# Altium PCB AD7175.PcbDoc
Units mil, origin at the board's own origin, x right, y up, seen from the top; angles counter-clockwise.
Board outline 2780 x 1750 mil, 2 copper layers (Top Layer, Bottom Layer); 97 components, 55 nets, 296 pads, 449 vias.
Unrouted connection lines stored in the file: 60.
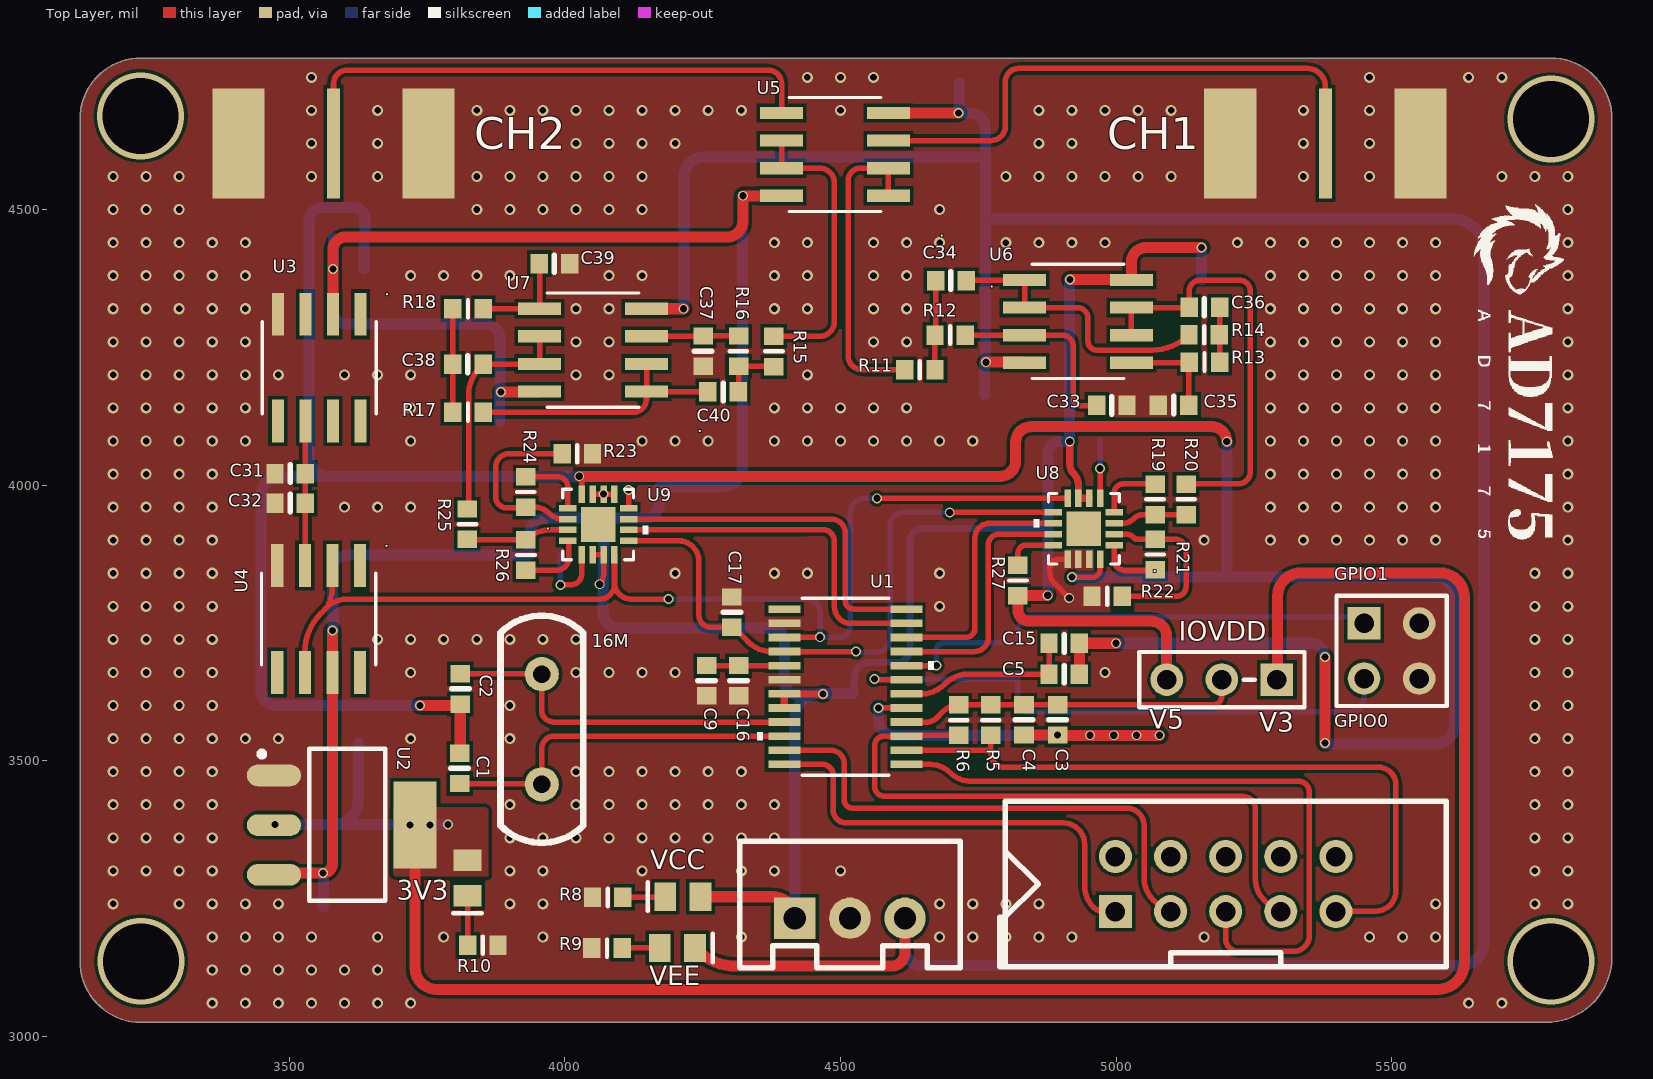
[diagram p0: Top Layer view]
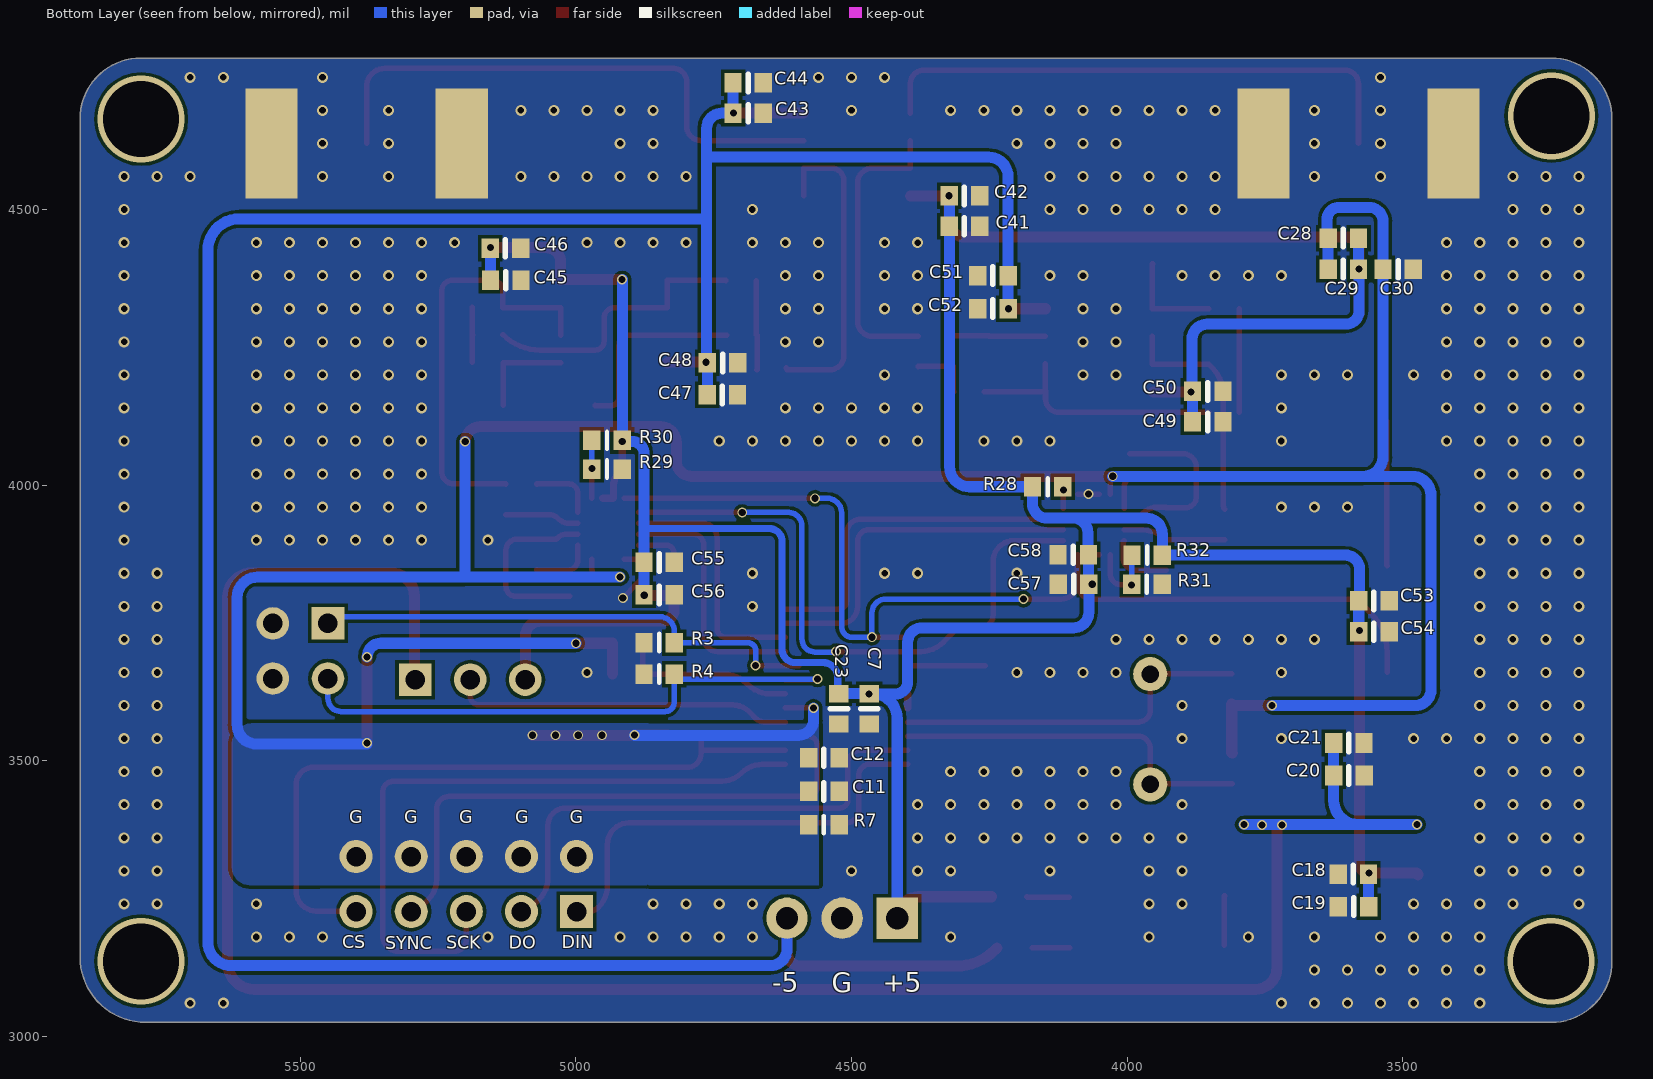
[diagram p1: Bottom Layer view, seen from below]

## Layer stack, top to bottom
Top Solder: solder mask 0.4, Solder Resist, Dk 3.5
Top Layer: signal copper 1.4
Dielectric 1: dielectric 12.6, FR-4, Dk 4.8
Bottom Layer: signal copper 1.4
Bottom Solder: solder mask 0.4, Solder Resist, Dk 3.5

## Board outline
3120,3135.83 ccw(c3230.83,3135.83) 3230.83,3025 4085,3025 5781.01,3025 ccw(c5781.01,3143.99) 5900,3143.99 5900,4664.17 ccw(c5789.17,4664.17) 5789.17,4775 3230.83,4775 ccw(c3230.83,4664.17) 3120,4664.17

## Design rules (kind name [scope] priority, off if disabled: settings)
Clearance [All] p1: gap=6 ignorepadtopadclearanceinfootprint=FALSE except(0: Arc-Hole Track-Hole SMDPad-Hole THPad-Hole Via-Hole Fill-Hole Poly-Hole Region-Hole Text-Hole; 5: Arc-SMDPad Arc-THPad Track-SMDPad Track-THPad SMDPad-SMDPad SMDPad-THPad THPad-THPad)
PolygonConnect [All] p1: connectstyle=Direct reliefconductorwidth=10 reliefentries=4 polygonreliefangle="90 Angle" airgapwidth=10
RoutingVias [All] p1: holewidth=28 width=50 viastyle="Through Hole" minholewidth=28 minwidth=50 maxholewidth=28 maxwidth=50
SolderMaskExpansion [All] p1: expansion=4 istentingtop=FALSE
Width [All] p1: maxlimit=100 minlimit=10 preferedwidth=10
30 further rules are at their usual default settings.

## Classes and differential pairs
component class reference: C28 C29 C30 C31 C32 C53 C54 U3 U4
component class power: C7 C18 C19 C20 C21 C23 R8 R9 R10 U2
component class filter: C33 C34 C35 C36 C37 C38 C39 C40 C45 C46 C47 C48 C49 C50 C51 C52 R11 R12 R13 R14 R15 R16 R17 R18 U6 U7
component class fda: C55 C56 C57 C58 R19 R20 R21 R22 R23 R24 R25 R26 R27 R28 R29 R30 R31 R32 U8 U9
component class core: C1 C2 C3 C4 C5 C9 C11 C12 C15 C16 C17 C41 C42 C43 C44 CH1 CH2 IOVDD R3 R4 R5 R6 R7 U1 U5

## Components (designator, comment, footprint, x,y, rotation, side; value= is the part's Value field where it differs from the comment)
3V3 "LED" Led-0805_L 3823,3287 r270 top (schematic designator LED3)
16M "XTAL" XTAL-PB2-DIP 3966,3547 r270 top value=16M (schematic designator Y1)
C1 "Cap-S" C0603-L 3809,3486 r90 top value=20pF
C2 "Cap-S" C0603-L 3810,3630 r270 top value=20pF
C3 "Cap-S" C0603-L 4894,3574 r90 top value=1uF
C4 "Cap-S" C0603-L 4833,3574 r90 top value=100nF
C5 "Cap-S" C0603-L 4906,3657 r180 top value=1uF
C7 "Cap-S" C0603-L 4468,3594 r270 bottom value=1uF
C9 "Cap-S" C0603-L 4257,3645 r90 top value=1uF
C11 "Cap-S" C0603-L 4550,3444 r180 bottom value=1uF
C12 "Cap-S" C0603-L 4550,3505 r180 bottom value=100nF
C15 "Cap-S" C0603-L 4906,3713 r180 top value=100nF
C16 "Cap-S" C0603-L 4315,3645 r90 top value=100nF
C17 "Cap-S" C0603-L 4303,3769.44 r270 top value=100nF
C18 "Cap-S" C0603-L 3589.44,3294 r180 bottom value=1uF
C19 "Cap-S" C0603-L 3588.88,3235 r180 bottom value=100nF
C20 "Cap-S" C0603-L 3597.44,3473 r0 bottom value=100nF
C21 "Cap-S" C0603-L 3597.56,3532 r0 bottom value=1uF
C23 "Cap-S" C0603-L 4523,3594 r270 bottom value=100nF
C28 "Cap-S" C0603-L 3607.44,4448 r180 bottom value=4.7uF
C29 "Cap-S" C0603-L 3607.44,4392 r180 bottom value=100nF
C30 "Cap-S" C0603-L 3508,4392 r0 bottom value=100nF
C31 "Cap-S" C0603-L 3501.44,4021 r0 top value=4.7uF
C32 "Cap-S" C0603-L 3501.44,3967 r0 top value=100nF
C33 "Cap-S" C0603-L 4992.44,4145 r180 top value=13pF
C34 "Cap-S" C0603-L 4700.44,4371 r0 top value=130pF
C35 "Cap-S" C0603-L 5104.44,4145 r0 top value=10pF
C36 "Cap-S" C0603-L 5160.44,4323 r180 top value=119pF
C37 "Cap-S" C0603-L 4251,4243 r90 top value=13pF
C38 "Cap-S" C0603-L 3824,4219 r0 top value=119pF
C39 "Cap-S" C0603-L 3981,4402 r180 top value=10pF
C40 "Cap-S" C0603-L 4287,4169 r180 top value=130pF
C41 "Cap-S" C0603-L 4295,4470 r0 bottom value=100nF
C42 "Cap-S" C0603-L 4295,4525 r0 bottom value=1uF
C43 "Cap-S" C0603-L 4687.44,4675 r0 bottom value=100nF
C44 "Cap-S" C0603-L 4687.44,4730 r0 bottom value=1uF
C45 "Cap-S" C0603-L 5127.44,4372 r0 bottom value=100nF
C46 "Cap-S" C0603-L 5128,4430 r0 bottom value=1uF
C47 "Cap-S" C0603-L 4734.44,4164 r0 bottom value=100nF
C48 "Cap-S" C0603-L 4734,4222 r0 bottom value=1uF
C49 "Cap-S" C0603-L 3853.56,4115 r0 bottom value=100nF
C50 "Cap-S" C0603-L 3853.56,4170 r0 bottom value=1uF
C51 "Cap-S" C0603-L 4243.44,4380 r180 bottom value=100nF
C52 "Cap-S" C0603-L 4243.44,4320 r180 bottom value=1uF
C53 "Cap-S" C0603-L 3552,3790 r0 bottom value=100nF
C54 "Cap-S" C0603-L 3552,3734 r0 bottom value=1uF
C55 "Cap-S" C0603-L 4849,3860 r0 bottom value=100nF
C56 "Cap-S" C0603-L 4849,3801 r0 bottom value=1uF
C57 "Cap-S" C0603-L 4097,3820 r180 bottom value=100nF
C58 "Cap-S" C0603-L 4097.61,3873.31 r180 bottom value=1uF
CH1 "SMA" SMA1 5380,4620 r270 top
CH2 "SMA" SMA1 3580,4620 r270 top
GPIO1 "Header 2X2" HDR2X2 5450,3749 r270 top (schematic designator GPIO)
IOVDD "Jumper" JUMPER1x3 5192,3647 r180 top
POWER "Power-3P" SIPA03 4417,3214 r0 top
R3 "R" R0603-L 4849,3714 r180 bottom value=10K
R4 "R" R0603-L 4849,3657 r180 bottom value=10K
R5 "R" R0603-L 4773,3573.56 r90 top value=10K
R6 "R" R0603-L 4715,3573.56 r90 top value=10K
R7 "R" R0603-L 4550.12,3384 r0 bottom value=0R
R8 "R" R0603-L 4077.44,3252 r180 top value=1K
R9 "R" R0603-L 4076.44,3160 r180 top value=1K
R10 "R" R0603-L 3851,3165 r0 top value=600R
R11 "R" R0603-L 4644,4209 r0 top value=6.25K
R12 "R" R0603-L 4699,4272 r0 top value=177K
R13 "R" R0603-L 5160.44,4223 r0 top value=31.9K
R14 "R" R0603-L 5160,4273 r180 top value=31.9K
R15 "R" R0603-L 4379,4242.56 r270 top value=6.25K
R16 "R" R0603-L 4315,4243 r90 top value=177K
R17 "R" R0603-L 3824,4132 r0 top value=31.9K
R18 "R" R0603-L 3824,4320 r180 top value=31.9K
R19 "R" R0603-L 5071,3974 r90 top value=1K
R20 "R" R0603-L 5127,3974 r270 top value=1K
R21 "R" R0603-L 5071,3874 r270 top value=1K
R22 "R" R0603-L 4984,3798 r0 top value=1K
R23 "R" R0603-L 4022.44,4057 r180 top value=1K
R24 "R" R0603-L 3929,3987.56 r90 top value=1K
R25 "R" R0603-L 3823,3929 r270 top value=1K
R26 "R" R0603-L 3929,3873 r270 top value=1K
R27 "R" R0603-L 4822,3827 r270 top value=0R
R28 "R" R0603-L 4144,3997 r0 bottom value=0R
R29 "R" R0603-L 4943.56,4029 r180 bottom value=0R
R30 "R" R0603-L 4943.56,4081 r180 bottom value=0R
R31 "R" R0603-L 3964,3820 r180 bottom value=0R
R32 "R" R0603-L 3963.56,3873 r180 bottom value=0R
SPI "DC-10P" DC-10P 5198.94,3226 r180 top
U1 "AD7175-2BRUZ" RU_24_ADI 4509,3634 r0 top
U2 "AMS1117" SOT-223 3597,3383 r270 top
U3 "ADR4540ARZ" R_8_ADI 3554,4213 r270 top
U4 "AD8628ARZ" R_8_ADI 3553,3757 r270 top
U5 "ADA4084-2ARZ" R_8_ADI 4490,4600 r180 top
U6 "ADA4084-2ARZ" R_8_ADI 4931,4297 r0 top
U7 "ADA4084-2ARZ" R_8_ADI 4051,4245 r180 top
U8 "ADA4945-1" CP_16_22 4941.53,3920.79 r180 top
U9 "ADA4945-1" CP_16_22 4060.21,3928.53 r0 top
VCC "LED" Led-0805_L 4214,3253 r180 top (schematic designator LED1)
VEE "LED" Led-0805_L 4204,3160 r0 top (schematic designator LED2)

## Footprints (in the part's own frame and the unit in brackets; to place one, negate y for a bottom-side part, rotate by r counter-clockwise, add the part's x,y. Pads: shape width x height; smd on the part's side, far side on the other; paste and mask are expansions set on the pad)
C0603-L [mm] "贴片电容0603 高密度"
  rect 0.8x0.9 smd: 1(-0.7,0) 2(0.7,0)
  silkscreen extent 0,-0.39 0,0.41, body extent -0.8,-0.4 0.8,0.41, height 0.88
CP_16_22 [mm]
  rect 0.805x0.3 smd paste+0 mask+0: 1(-1.402,0.75) 2(-1.402,0.25) 3(-1.402,-0.25) 4(-1.402,-0.75) 9(1.402,-0.75) 10(1.402,-0.25) 11(1.402,0.25) 12(1.402,0.75)
  rect 0.3x0.805 smd paste+0 mask+0: 5(-0.75,-1.402) 6(-0.25,-1.402) 7(0.25,-1.402) 8(0.75,-1.402) 13(0.75,1.402) 14(0.25,1.402) 15(-0.25,1.402) 16(-0.75,1.402)
  rect 1.6x1.6 smd paste-0.787 mask+0: 17(0,0)
  silkscreen extent -1.63,-1.63 2.31,1.63, body extent 0,0 0.25,0.25, height 0.25
DC-10P [mil]
  rect 60x60 hole 35.43: 1(200,0)
  round 60 hole 35.43: 2(100,0) 3(0,0) 4(-100,0) 5(-200,0) 6(-200,-100) 7(-100,-100) 8(0,-100) 9(100,-100) 10(200,-100)
  silkscreen extent -400,-200 410,100, body extent -401,-233 401,123, height 357
HDR2X2 [mm] "Connector; Header; 2x2 Position"
  rect 1.5x1.5 hole 0.9: 1(0,0)
  round 1.5 hole 0.9: 2(0,2.54) 3(2.54,0) 4(2.54,2.54)
  silkscreen extent -1.27,-1.27 3.81,3.81
JUMPER1x3 [mm]
  rect 1.5x1.5 hole 0.9: 1(-2.54,0)
  round 1.5 hole 0.9: 2(0,0) 3(2.54,0)
  silkscreen extent -3.81,-1.27 3.81,1.27, body extent -3.81,-1.27 3.81,1.3, height 9.26
Led-0805_L [mm] "贴片LED0805-高密度"
  rect 1x1.3 smd: 1(-0.813,0) 2(0.813,0)
  silkscreen extent 1.63,-0.66 1.63,0.66, body extent -1.03,-0.44 1.03,0.47, height 0.85
R0603-L [mm] "贴片电阻0603 高密度"
  rect 0.8x0.9 smd: 1(-0.7,0) 2(0.7,0)
  silkscreen extent 0,-0.39 0,0.41, body extent -0.81,-0.43 0.79,0.39, height 0.53
R_8_ADI [mil]
  rect 78x22 smd paste+0 mask+0: 1(-97,75) 2(-97,25) 3(-97,-25) 4(-97,-75) 5(97,-75) 6(97,-25) 7(97,25) 8(97,75)
  silkscreen extent -84,-103 84,104, body extent -122,-99 122,99, height 69
RU_24_ADI [mil]
  rect 58x14 smd paste+0 mask+0: 1(-111,140.75) 2(-111,115.16) 3(-111,89.57) 4(-111,63.98) 5(-111,38.39) 6(-111,12.8) 7(-111,-12.8) 8(-111,-38.39) 9(-111,-63.98) 10(-111,-89.57) 11(-111,-115.16) 12(-111,-140.75) 13(111,-140.75) 14(111,-115.16) 15(111,-89.57) 16(111,-63.98) 17(111,-38.39) 18(111,-12.8) 19(111,12.8) 20(111,38.39) 21(111,63.98) 22(111,89.57) 23(111,115.16) 24(111,140.75)
  silkscreen extent -160,-160 160,160, body extent -126,-156 126,156, height 47
SIPA03 [mil]
  rect 75x75 hole 40: 1(0,0)
  round 75 hole 40: 2(100,0) 3(200,0)
  silkscreen extent -100,-90 300,140, body extent -96,-99 298,137, height 276
SMA1 [mil]
  rect 200x24 smd: 1(0,0)
  rect 200x95 smd: 2(0,-172.5) 2(0,172.5)
  rect 200x95 smd far side: 2(0,-172.5)
  rect 200x95 smd far side mask+4: 2(0,172.5)
  body extent -475,-187 87,187, height 171
SOT-223 [mm]
  oval 1x2.5 smd: 1(-2.29,-3.175) 2(0,-3.175) 3(2.29,-3.175)
  rect 4x2 smd: 2(0,3.325)
  silkscreen extent -3.52,-3.86 3.48,1.96, body extent -3.25,-3.2 3.25,3.76, height 1.66
XTAL-PB2-DIP [mil]
  round 62 hole 32: 1(-110,-8) 2(90,-8)
  silkscreen extent -216,-83 196,67, body extent -234,-99 212,85, height 142

## Part data
3V3 VCC VEE: "发光二极管"
16M: "晶振"
C1 C2 C3 C4 C5 C7 C9 C11 C12 C15 C16 C17 C18 C19 C20 C21 C23 C28 C29 C30 C31 C32 C33 C34 C35 C36 C37 C38 C39 C40 C41 C42 C43 C44 C45 C46 C47 C48 C49 C50 C51 C52 C53 C54 C55 C56 C57 C58: "贴片瓷片电容"
GPIO1: "Header, 2-Pin, Dual row", LatestRevisionDate=17-Jul-2002, LatestRevisionNote="Re-released for DXP Platform.", Publisher="Altium Limited"
IOVDD: library part Jumper1*3
POWER: "供电端子"
R3 R4 R5 R6 R7 R8 R9 R10 R11 R12 R13 R14 R15 R16 R17 R18 R19 R20 R21 R22 R23 R24 R25 R26 R27 R28 R29 R30 R31 R32: library part Res, "贴片电阻"
U1 U3 U4 U5 U6 U7: "No Description Available", Mfr_Name="Analog Devices Inc", Copyright="Copyright (C) 2021 Ultra Librarian. All rights reserved.", RefDes=RefDes, Type=DEV
  U1: Manufacturer_Part_Number=AD7175-2BRUZ
  U3: Manufacturer_Part_Number=ADR4540ARZ
  U4: Manufacturer_Part_Number=AD8628ARZ
  U5 U6 U7: Manufacturer_Part_Number=ADA4084-2ARZ

## Via types
v1: diameter 20, hole 12, Top Layer to Bottom Layer, 402 vias
v2: diameter 18, hole 13, Top Layer to Bottom Layer, 43 vias
v3: diameter 157.48, hole 137.8, Top Layer to Bottom Layer, 4 vias

## Nets (pads, with @x,y where several pads share a name; then routed paths per layer and width w, separated by ;. In a path a pad name is that pad's centre, name@x,y a point inside that pad or via, vN(x,y) a via of type N, cw(c..) or ccw(c..) an arc to the next point about the centre after c; other vN are vias at no path point)
3V3: 3V3.1 C20.2 C21.2 IOVDD.1 U2.2 | length 3903.6
  Top Layer w20: U2.2@3727.91,3383 3727.91,3124.09 ccw(c3767,3124.09) 3767,3085 5584,3085 ccw(c5584,3133) 5632,3133 5632,3796.57 ccw(c5587.91,3796.57) 5587.91,3840.66 5335.66,3840.66 ccw(c5335.66,3798) 5293,3798 5293,3648 cw(c5292,3648) IOVDD.1
  Bottom Layer w20: v2(3474,3384) 3581,3384 ; C21.2 3625,3532 C20.2 3625,3428 cw(c3581,3428) 3581,3384 ; v2(3788,3384) 3581,3384
  other v2: 3719,3383 3755,3383
AIN0: U1.21 U8.11 | length 460
  Top Layer w10: U1.21 4742.98,3697.98 ccw(c4742.98,3723) 4768,3723 4768,3891 cw(c4787.94,3891) 4787.94,3910.94 U8.11
AIN1: U1.22 U8.10 | length 454.9
  Top Layer w10: U1.22 4727.57,3723.57 ccw(c4727.57,3740) 4744,3740 4744,3904 cw(c4770.63,3904) 4770.63,3930.63 U8.10
AIN2: U1.23 U9.10 | length 653.1
  Top Layer w10: U9.10 4439,3918.69 4439,3919 4468,3919 cw(c4468,3898) 4489,3898 4489,3779.16 ccw(c4519.16,3779.16) 4519.16,3749 4620,3749 U1.23
AIN3: U1.24 U9.11 | length 650.7
  Top Layer w10: U9.11 4482.63,3938.37 cw(c4482.63,3912) 4509,3912 4509,3789.32 ccw(c4523.32,3789.32) 4523.32,3775 4620,3775 U1.24
AVSS: C7.2 C9.1 C11.2 C12.2 C16.1 C17.1 C18.1 C19.1 C20.1 C21.1 C23.2 C30.1 C31.1 C32.1 C33.1 C35.1 C37.1 C39.1 C41.1 C42.1 C43.1 C44.1 C45.1 C46.1 C47.1 C48.1 C49.1 C50.1 C51.1 C52.1 C53.1 C54.1 C55.1 C56.1 C57.1 C58.1 CH1.2 CH2.2 GPIO1.2 GPIO1.4 POWER.2 R3.1 R4.1 R7.1 R8.2 R9.2 R10.2 R22.1 R23.1 R29.2 R31.2 U1.2 U1.6 U2.1 U3.4 U4.4 U8.13 U8.14 U8.15 U9.13 U9.14 U9.15 | length 148.7
  Top Layer w10: U9.15 v2(4070.06,3983.74) U9.13 ; U8.13 4895.57,3865.57 ccw(c4895.57,3850) 4880,3850 4880,3840 ccw(c4904.14,3840) 4887.07,3822.93 v2(4915,3795)
  other v1: 3360,3060 3420,3060 3480,3060 3540,3060 3600,3060 3660,3060 3720,3060 5640,3060 5700,3060 3360,3120 3420,3120 3480,3120 3540,3120 3600,3120 3660,3120 3360,3180 3420,3180 3480,3180 3540,3180 3660,3180 3780,3180 3960,3180 4320,3180 4680,3180 4740,3180 4800,3180 4860,3180 4920,3180 5160,3180 5460,3180 5520,3180 5580,3180 3180,3240 3300,3240 3360,3240 3420,3240 3480,3240 3900,3240 3960,3240 4680,3240 4740,3240 4800,3240 4860,3240 5580,3240 5760,3240 5820,3240 3180,3300 3240,3300 3300,3300 3360,3300 3900,3300 3960,3300 4140,3300 4320,3300 4380,3300 4500,3300 5760,3300 5820,3300 3180,3360 3240,3360 3300,3360 3360,3360 3900,3360 3960,3360 4020,3360 4080,3360 4140,3360 4200,3360 4260,3360 4320,3360 4380,3360 5760,3360 5820,3360 3180,3420 3240,3420 3300,3420 3360,3420 3900,3420 4020,3420 4080,3420 4140,3420 4200,3420 4260,3420 4320,3420 4380,3420 5760,3420 5820,3420 3180,3480 3240,3480 3300,3480 3360,3480 4020,3480 4080,3480 4140,3480 4200,3480 4260,3480 4320,3480 5760,3480 5820,3480 3180,3540 3240,3540 3300,3540 3360,3540 3420,3540 3480,3540 3720,3540 3900,3540 5760,3540 5820,3540 3180,3600 3240,3600 3300,3600 3360,3600 3900,3600 5760,3600 5820,3600 3180,3660 3240,3660 3300,3660 3360,3660 3720,3660 4020,3660 4080,3660 4140,3660 4200,3660 4980,3660 5760,3660 5820,3660 3180,3720 3240,3720 3300,3720 3360,3720 3660,3720 3720,3720 3780,3720 3840,3720 3900,3720 3960,3720 4020,3720 5760,3720 5820,3720 3180,3780 3240,3780 3300,3780 3360,3780 4680,3780 5760,3780 5820,3780 3180,3840 3240,3840 3300,3840 3360,3840 4200,3840 4380,3840 4440,3840 4680,3840 5760,3840 5820,3840 3180,3900 3240,3900 3300,3900 3360,3900 5160,3900 5280,3900 5340,3900 5400,3900 5460,3900 5520,3900 5580,3900 5820,3900 3180,3960 3240,3960 3300,3960 3360,3960 3600,3960 3660,3960 3720,3960 5280,3960 5340,3960 5400,3960 5460,3960 5520,3960 5580,3960 5820,3960 3180,4020 3240,4020 3300,4020 3360,4020 5280,4020 5340,4020 5400,4020 5460,4020 5520,4020 5580,4020 5820,4020 3180,4080 3240,4080 3300,4080 3360,4080 3420,4080 3720,4080 4140,4080 4200,4080 4260,4080 4380,4080 4440,4080 4500,4080 4560,4080 4620,4080 4680,4080 4740,4080 5280,4080 5340,4080 5400,4080 5460,4080 5520,4080 5580,4080 5820,4080 3180,4140 3240,4140 3300,4140 3360,4140 3420,4140 3720,4140 4380,4140 4440,4140 4500,4140 4560,4140 4620,4140 5280,4140 5340,4140 5400,4140 5460,4140 5520,4140 5580,4140 5820,4140 3180,4200 3240,4200 3300,4200 3360,4200 3420,4200 3480,4200 3600,4200 3660,4200 3720,4200 4020,4200 4080,4200 4440,4200 5280,4200 5340,4200 5400,4200 5460,4200 5520,4200 5580,4200 5820,4200 3180,4260 3240,4260 3300,4260 3360,4260 3420,4260 4020,4260 4080,4260 4560,4260 4620,4260 5280,4260 5340,4260 5400,4260 5460,4260 5520,4260 5580,4260 5820,4260 3180,4320 3240,4320 3300,4320 3360,4320 3420,4320 4020,4320 4080,4320 4380,4320 4440,4320 4560,4320 4620,4320 5280,4320 5340,4320 5400,4320 5460,4320 5520,4320 5580,4320 5820,4320 3180,4380 3240,4380 3300,4380 3360,4380 3420,4380 3720,4380 3780,4380 3840,4380 3900,4380 4080,4380 4140,4380 4380,4380 4440,4380 4560,4380 4620,4380 5280,4380 5340,4380 5400,4380 5460,4380 5520,4380 5580,4380 5820,4380 3180,4440 3240,4440 3300,4440 3360,4440 3420,4440 4380,4440 4440,4440 4560,4440 4620,4440 4680,4440 4800,4440 4860,4440 4920,4440 4980,4440 5220,4440 5280,4440 5340,4440 5400,4440 5460,4440 5520,4440 5580,4440 5820,4440 3180,4500 3240,4500 3300,4500 3840,4500 3900,4500 3960,4500 4020,4500 4080,4500 4140,4500 4680,4500 5820,4500 3180,4560 3240,4560 3300,4560 3540,4560 3660,4560 3840,4560 3900,4560 3960,4560 4020,4560 4080,4560 4140,4560 4800,4560 4860,4560 4920,4560 4980,4560 5040,4560 5100,4560 5340,4560 5460,4560 5700,4560 5760,4560 5820,4560 3540,4620 3660,4620 4020,4620 4080,4620 4140,4620 4200,4620 4860,4620 4920,4620 5340,4620 5460,4620 3540,4680 3660,4680 3840,4680 3900,4680 3960,4680 4020,4680 4080,4680 4140,4680 4200,4680 4260,4680 4320,4680 4500,4680 4860,4680 4920,4680 4980,4680 5040,4680 5100,4680 5340,4680 5460,4680 3540,4740 4440,4740 4500,4740 4560,4740 5460,4740 5640,4740 5700,4740
CH1_Filter: C36.2 R20.1 U6.6 U6.7 | length 775.5
  Top Layer w10: U6.6 U6.7 5131.88,4322 ccw(c5131.88,4323) C36.2 5132.88,4351.88 cw(c5153,4351.88) 5153,4372 5223,4372 cw(c5223,4351) 5244,4351 5244,4025 cw(c5221,4025) 5221,4002 5127,4002 R20.1
CH1_Foller: R11.1 U5.1 U5.2 | length 575
  Top Layer w10: U5.1 U5.2 4536,4575 ccw(c4536,4553) 4514,4553 4514,4235 ccw(c4540,4235) 4540,4209 R11.1 ccw(c4612.68,4212.76) R11.1@4618,4212.76
CH2_Filter: C38.2 R25.1 U7.6 U7.7 | length 423.9
  Top Layer w10: R25.1 ccw(c3818.17,3961.39) 3825,3961.39 3825,4163 cw(c3896.08,4163) 3845.82,4213.26 C38.2 3953,4219 ccw(c3953,4220) U7.7 U7.6
CH2_Foller: R15.1 U5.6 U5.7 | length 537.9
  Top Layer w10: R15.1 4379,4270 4462,4270 ccw(c4462,4297) 4489,4297 4489,4548 ccw(c4462,4548) 4462,4575 U5.7 U5.6
CS: R5.1 SPI.5 U1.14 | length 1276.3
  Top Layer w10: U1.14 4773,3518.84 ; R5.1 4773,3518.84 ; SPI.5 cw(c5399.94,3226) 5399.94,3227 5471,3227 ccw(c5471,3264) 5508,3264 5508,3456 ccw(c5476,3456) 5476,3488 4798,3488 cw(c4798,3513) 4773,3513 4773,3518.84
DGND: C1.2 C2.2 C3.1 C4.1 C5.1 C11.1 C12.1 C15.1 C28.1 C29.1 C30.2 R7.2 SPI.6 SPI.7 SPI.8 SPI.9 SPI.10 U1.17 U8.16 U9.16 | length 6271.1
  Top Layer w10: v2(4026,4016) cw(c4014.69,4004.69) 4030.69,4004.69 U9.16 ; v2(4569,3595.61) U1.17 ; v2(4920,3833) 4957,3833 ccw(c4957,3847.06) 4971.06,3847.06 U8.16
  Top Layer w20: v2(3737,3600) 3807.56,3600 C2.2 3810,3514.56 cw(c3809,3514.56) C1.2 ; v2(4026,4016) 4790,4016 ccw(c4790,4044) 4818,4044 4818,4078 cw(c4846,4078) 4846,4106 5174,4106 cw(c5174,4079) v2(5201,4079) ; C4.1 v2(4894,3546.44) 4894.44,3546 v2(4953,3546) v2(4996,3546) v2(5037,3546) v2(5079,3546) ; C5.1 C15.1 v2(5000,3713) ; v2(5379,3532) v2(5379,3688)
  Bottom Layer w20: C29.1 C28.1 ccw(c3635,4450) 3637,4450 3637,4482 ccw(c3615,4482) 3615,4504 3561,4504 ccw(c3561,4478.56) 3535.56,4478.56 C30.2 3535.56,4051.44 ccw(c3571,4051.44) 3571,4016 ; v2(3737,3600) 3477,3600 cw(c3477,3628.51) 3448.49,3628.51 3448.49,3981.49 cw(c3483,3981.49) 3483,4016 3571,4016 ; v2(4026,4016) 3571,4016 ; v2(4569,3595.61) 4569,3573 ccw(c4596,3573) 4596,3546 4894,3546 v2(4894,3546.44) ; v2(4920,3833) 5202,3833 ; v2(5000,3713) 5354,3713 cw(c5354,3688) v2(5379,3688) ; v2(5201,4079) 5201,3834 ccw(c5202,3834) 5202,3833 ; v2(5379,3532) ccw(c5381,3532) 5381,3530 5579,3530 ccw(c5579,3566) 5615,3566 5615,3796 ccw(c5578,3796) 5578,3833 5202,3833
DIN: SPI.1 U1.12 | length 815.3
  Top Layer w10: U1.12 4466.81,3493.25 cw(c4466.81,3473.06) 4487,3473.06 4487,3410 ccw(c4510,3410) 4510,3387 4904.04,3387 cw(c4904.04,3348.04) 4943,3348.04 4943,3272.63 ccw(c4997.63,3272.63) 4959,3234 ccw(c4978.31,3253.31) 4978.31,3226 SPI.1
DOUT: SPI.2 U1.11 | length 937.7
  Top Layer w10: U1.11 4482.16,3518.84 cw(c4482.16,3494) 4507,3494 4507,3428 ccw(c4521,3428) 4521,3414 5019,3414 cw(c5019,3382) 5051,3382 5051,3286.63 ccw(c5105.63,3286.63) 5067,3248 SPI.2@5081.97,3233.03 ; SPI.2@5081.98,3233.02 ccw(c5098.94,3249.99) SPI.2
GPIO0: GPIO1.3 R4.2 U1.19 | length 1062
  Top Layer w10: v2(4562,3648) ccw(c4563.2,3648) 4563.2,3646.8 U1.19
  Bottom Layer w10: v2(4562,3648) 4812.44,3648 ccw(c4812.44,3657) R4.2 4821.44,3606.56 ccw(c4839,3606.56) 4839,3589 5426,3589 ccw(c5426,3613) 5450,3613 GPIO1.3
GPIO1: GPIO1.1 R3.2 U1.20 | length 930.6
  Top Layer w10: U1.20@4595.94,3672.39 U1.20 v2(4674,3672.39) v2@4674,3672
  Bottom Layer w10: v2(4674,3672.39) 4674,3700 cw(c4688,3700) 4688,3714 R3.2 4821.44,3734.44 cw(c4848,3734.44) 4848,3761 5438,3761 GPIO1.1
IOVDD: C3.2 C4.2 IOVDD.2 R5.2 R6.2 U1.16 | length 633
  Top Layer w10: U1.16 4658.57,3570.02 ccw(c4658.57,3590.43) 4672.99,3575.99 4686.18,3589.18 cw(c4715,3560.36) R6.2 ; R6.2@4703.84,3598.9 cw(c4715,3571.96) 4706.34,3599.8 cw(c4715,3571.96) R6.2 ; IOVDD.2 5192,3617 cw(c5176.56,3617) 5176.56,3601.56 C3.2 C4.2 4833,3601.12 R5.2 R6.2
NetC31_2: C31.2 C32.2 U3.6 U4.3 | length 262.3
  Top Layer w10: U4.3 ccw(c3525.59,3856.41) 3529,3856.41 C32.2 C31.2 U3.6
NetC33_2: C33.2 R12.2 U6.3 | length 352.3
  Top Layer w10: R12.2 U6.3 4903,4272 cw(c4903,4253) 4922,4253 4922,4159 ccw(c4937,4159) 4937,4144 4963.88,4144 ccw(c4963.88,4145) C33.2
NetC34_1: C34.1 R11.2 R12.1 | length 162.9
  Top Layer w10: R11.2 4671.44,4209 R12.1 ccw(c4671.44,4273.44) 4672.88,4273.44 C34.1
NetC34_2: C34.2 R14.2 U6.1 U6.2 | length 524.5
  Top Layer w10: C34.2 cw(c4729,4371) 4729,4372 U6.1 U6.2 4930,4322 cw(c4930,4303) 4949,4303 4949,4261 ccw(c4965,4261) 4965,4245 5064.84,4245 ccw(c5064.84,4340.6) R14.2
NetC35_2: C35.2 R13.1 U6.5 | length 181
  Top Layer w10: U6.5 5132,4222 C35.2
NetC36_1: C36.1 R13.2 R14.1 | length 100.4
  Top Layer w10: R14.1 R14.1@5188,4273 ; R13.2 R14.1@5188,4273 ; C36.1 R14.1@5188,4273
NetC37_2: C37.2 R16.2 U7.3 | length 167.6
  Top Layer w10: U7.3 4251,4270 C37.2 R16.2
NetC38_1: C38.1 R17.1 R18.2 | length 188
  Top Layer w10: R17.1 C38.1 R18.2
NetC39_2: C39.2 R18.1 U7.5 | length 185
  Top Layer w10: R18.1 U7.5 3954,4402 C39.2
NetC40_1: C40.1 R15.2 R16.1 | length 111.3
  Top Layer w10: C40.1 4315,4169 R16.1 4379,4215.44 R15.2
NetC40_2: C40.2 R17.2 U7.1 U7.2 | length 485.9
  Top Layer w10: R17.2 4123.31,4132 ccw(c4123.31,4156.66) 4147.98,4156.66 U7.1 ; U7.2 U7.1 ; C40.2 4149,4169 cw(c4149,4170) U7.1
NetCH1_1: CH1.1 U5.3 | length 1024.4
  Top Layer w10: U5.3 4773,4625 ccw(c4773,4651) 4799,4651 4799,4732 cw(c4823,4732) 4823,4756 5347,4756 cw(c5347,4723) 5380,4723 CH1.1
NetCH2_1: CH2.1 U5.5 | length 1003
  Top Layer w10: CH2.1 3580,4728 cw(c3605,4728) 3605,4753 4369,4753 cw(c4369,4729) 4393,4729 U5.5
NetLED1_2: R8.1 VCC.2 | length 77.3
  Top Layer w10: R8.1 4179.59,3252 ccw(c4179.59,3255.41) VCC.2
NetLED2_1: R9.1 VEE.1 | length 68
  Top Layer w10: R9.1 VEE.1
NetLED3_2: 3V3.2 R10.1 | length 90.1
  Top Layer w10: 3V3.2 cw(c3821.94,3253.94) 3823.44,3253.94 R10.1
NetR19_1: R19.1 R20.2 U8.3 | length 134.5
  Top Layer w10: U8.3 5011.79,3930.63 ccw(c5011.79,3959.21) 5032,3939 cw(c5049.96,3921.04) 5049.96,3946.44 R19.1 R20.2
NetR19_2: R19.2 U8.4 | length 119.4
  Top Layer w10: U8.4 4996.74,3985.74 cw(c5013,3985.74) 5013,4002 5071,4002 R19.2
NetR21_1: R21.1 R22.2 U8.2 | length 335.6
  Top Layer w10: U8.2 5017.65,3910.94 cw(c5017.65,3890.65) 5032,3905 ccw(c5040.31,3913.31) 5040.31,3901.56 R21.1 5107.44,3901.56 cw(c5107.44,3882) 5127,3882 5127,3816 cw(c5109,3816) 5109,3798 R22.2
NetR21_2: R21.2 U8.1 | length 113.1
  Top Layer w10: U8.1 4996.74,3864.26 ccw(c5016,3864.26) 5016,3845 5069.56,3845 ccw(c5069.56,3846.44) R21.2
NetR23_2: R23.2 R24.1 U9.2 | length 336.9
  Top Layer w10: R23.2 3899,4057 ccw(c3899,4032) 3874,4032 3874,3979 ccw(c3894,3979) 3894,3959 3928,3959 ccw(c3928,3960) R24.1 3944.44,3960 cw(c3944.44,3922.44) 3971,3949 ccw(c3996.66,3974.66) 3996.66,3938.37 U9.2
NetR24_2: R24.2 U9.1 | length 125.3
  Top Layer w10: R24.2 3986.88,4015.12 cw(c3986.88,3997) 4005,3997 U9.1
NetR25_2: R25.2 R26.1 U9.3 | length 187
  Top Layer w10: R25.2@3823,3901 3927.94,3901 cw(c3927.94,3899.49) R26.1 cw(c3972.76,3856.8) 3972.76,3918.69 U9.3
NetR26_2: R26.2 U9.4 | length 123
  Top Layer w10: R26.2 3984.44,3845.44 ccw(c3984.44,3868) 4007,3868 4007,3897 ccw(c4005,3897) U9.4
NetR27_1: R27.1 U8.12 | length 94.5
  Top Layer w10: R27.1 4822,3876 cw(c4837.26,3876) 4837.26,3891.26 U8.12
NetR28_1: R28.1 U9.12 | length 32.9
  Top Layer w10: U9.12 v2(4115.43,3991)
NetR29_1: R29.1 R30.1 U8.5 | length 105.1
  Top Layer w10: v2@4971,4030 v2(4971.06,4030) U8.5
  Bottom Layer w10: v2(4971.06,4030) R30.1 R30.1
NetR31_1: R31.1 R32.1 U9.5 | length 138.6
  Top Layer w10: v2(3992,3819) 4010,3819 ccw(c4010,3839.68) 4030.68,3839.68 U9.5
  Bottom Layer w10: R32.1 3991.12,3819.88 ccw(c3992,3819.88) v2(3992,3819)
REF_2V5: C17.2 U1.4 U8.9 U9.9 | length 1151.6
  Top Layer w10: U9.9 4205.94,3899 cw(c4205.94,3861.94) 4243,3861.94 4243,3764 ccw(c4265,3764) 4265,3742 4303,3742 C17.2 cw(c4303,3734.35) 4308.31,3739.69 4333,3715 ccw(c4374.1,3756.1) 4374.1,3697.98 U1.4 v2(4527.98,3697.98) ; v2@4698,3950 v2(4698.31,3950.32) U8.9
  Bottom Layer w10: v2(4527.98,3697.98) ccw(c4528.95,3697.98) 4528.95,3697 4566,3697 ccw(c4566,3721) 4590,3721 4590,3926 cw(c4614.31,3926) 4614.31,3950.32 v2(4698.31,3950.32)
REF_4V096: U1.3 U4.2 U4.6 U8.8 U9.8 | length 2048.1
  Top Layer w10: U4.6 3528,3696.56 cw(c3628,3696.56) 3557.29,3767.27 3568.32,3778.3 ; U4.2 3578,3816.94 cw(c3496.06,3816.94) 3568.32,3778.3 ; v2(4188,3793) 4120,3793 cw(c4120,3823.26) 4089.99,3819.36 ; U1.3 4461.95,3723.57 ccw(c4461.95,3725.05) v2(4463,3724) ; v2(4566,3976) U8.8 ; 3568.32,3778.3 cw(c3603.81,3742.8) 3603.81,3793 4063,3793 ccw(c4063,3820) 4089.99,3819.36 ; 4089.99,3819.36 ccw(c4063,3820) 4090,3820 4090,3873.06 U9.8 4089.74,3823.26 ccw(c4120,3823.26) 4089.99,3819.36
  Bottom Layer w10: v2(4188,3793) 4438,3793 cw(c4438,3768) 4463,3768 v2(4463,3724) 4499,3724 ccw(c4499,3743) 4518,3743 4518,3950 cw(c4544,3950) 4544,3976 v2(4566,3976)
REGCAPA: C9.2 C16.2 U1.5 | length 141.1
  Top Layer w10: C9.2 C16.2 4315.17,3672.39 U1.5
REGCAPD: C5.2 C15.2 U1.18 | length 324.2
  Top Layer w10: U1.18 4648.74,3621.2 4648.8,3621.2 ccw(c4648.8,3671.65) 4668.11,3625.04 ccw(c4641.68,3688.85) 4690.52,3640.02 4690.55,3640.05 cw(c4731.53,3599) 4731.53,3657 4731.59,3657 C5.2 C15.2
SCLK: SPI.3 U1.13 | length 1241.2
  Top Layer w10: U1.13 4661.56,3493.25 cw(c4661.56,3439.14) 4699.83,3477.4 ccw(c4734.6,3512.17) 4734.6,3463 5330,3463 cw(c5330,3442) 5351,3442 5351,3183 cw(c5322,3183) 5322,3154 5221,3154 cw(c5221,3176) 5199,3176 5199,3226 SPI.3
SYNC: R6.1 SPI.4 U1.15 | length 1159.4
  Top Layer w10: R6.1 4621.57,3546 ccw(c4621.57,3544.43) U1.15 4579.43,3544.43 ccw(c4579.43,3527) 4562,3527 4562,3453 ccw(c4580,3453) 4580,3435 5230,3435 cw(c5230,3412) 5253,3412 5253,3284.21 ccw(c5304.21,3284.21) 5267.99,3248.01 5283.68,3232.32 ccw(c5298.94,3247.58) SPI.4
VCC: C7.1 C18.2 C19.2 C23.1 C28.2 C29.2 C41.2 C42.2 C45.2 C46.2 C49.2 C50.2 C53.2 C54.2 C55.2 C56.2 C57.2 C58.2 IOVDD.3 POWER.1 R27.2 R28.2 R30.2 R32.2 U1.7 U1.8 U2.3 U3.2 U4.7 U5.8 U6.8 U7.8 U8.6 U8.7 U9.6 U9.7 VCC.1 | length 7464.1
  Top Layer w10: U9.6 U9.7 4070.06,3840.06 4070,3840 4070,3836.9 cw(c4046.1,3836.9) v2(4063,3820)
  Top Layer w13: U7.8@3953,4169 ccw(c3953,4170) U7.8 ; U1.8 U1.7 v2(4468,3621.2) ; v2(4916,4079) 4916,4037.9 ccw(c4939.9,4037.9) 4923,4021 cw(c4902.03,4000.03) 4931.69,4000.03 U8.7 U8.6
  Top Layer w20: U2.3 cw(c3475.16,3292.84) 3475.16,3296 v2(3561,3296) ccw(c3561,3313) 3578,3313 U4.7 v2(3578,3736) ; U3.2 v2(3579,4392) 3579,4427 cw(c3602,4427) 3602,4450 4294,4450 ccw(c4294,4479) 4323,4479 v2(4323,4525) U5.8 ; v2(3884,4169) U7.8@3953,4169 ; VCC.1 4378,3253 cw(c4378,3214) POWER.1 ; v2@4468,3621 v2(4468,3621.2) ; v2(4876,3800) 4822,3800 R27.2 4822,3773 ccw(c4842,3773) 4842,3753 5064,3753 cw(c5064,3725) 5092,3725 IOVDD.3 ; v2(4916.5,4373) 5027,4373 U6.8 5028,4405 cw(c5054,4405) 5054,4431 v2(5155,4431)
  Bottom Layer w13: C53.2@3578,3791.56 ccw(c3579.56,3791.56) C53.2 ; C50.2@3882,4171 ccw(c3884,4171) v2(3884,4169) ; C58.2 ccw(c4070.06,3874.26) C58.2@4071,3874.26 ; C23.1 ccw(c4523,3623.56) 4525,3623.56 4525,3651 cw(c4552,3651) 4552,3678 4602,3678 ccw(c4602,3702) 4626,3702 4626,3898 cw(c4649,3898) 4649,3921 4876.56,3921
  Bottom Layer w20: C19.2 3561.88,3235 C18.2 ; C53.2@3578,3791.56 3578,3847 cw(c3604,3847) 3604,3873 R32.2 3936,3911 cw(c3965,3911) 3965,3940 4145,3940 ccw(c4145,3966.56) 4171.56,3966.56 R28.2 4286,3997 ccw(c4286,4033) 4322,4033 4322,4470 C41.2 C42.2 ; v2(3579,4392) 3579,4316 ccw(c3603,4316) 3603,4292 3855,4292 cw(c3855,4265) 3882,4265 C50.2@3882,4171 ; C54.2 C53.2 ; C29.2 C28.2 ; C49.2 C50.2 ; C58.2 4070.06,3820 C57.2 4069.44,3768.56 ccw(c4097,3768.56) 4097,3741 4372,3741 cw(c4372,3715) 4398,3715 4398,3643 ccw(c4420,3643) 4420,3621 C7.1@4454.37,3621 ; C58.2@4071,3874.26 4071,3914 cw(c4097,3914) 4087,3938 ; POWER.1 4417,3576.21 cw(c4462.52,3576.21) C7.1@4454.37,3621 ; C23.1 C7.1 4460.56,3621.56 ccw(c4460.56,3587) C7.1@4454.37,3621 ; C56.2 C55.2 4876.56,3921 4876.56,4057.56 cw(c4898,4057.56) 4898,4079 v2(4916,4079) ; R30.2 v2@4916,4373 ; C45.2 5155,4430 C46.2
VEE: C43.2 C44.2 C47.2 C48.2 C51.2 C52.2 POWER.3 U5.4 U6.4 U7.4 VEE.2 | length 5488.9
  Top Layer w20: U7.4 v2(4215,4320) ; VEE.2 4239.71,3156.29 ccw(c4310.42,3227) 4310.42,3127 4592,3127 ccw(c4592,3152) 4617,3152 POWER.3 ; U5.4 v2(4714,4675) ; v2(4764,4223) 4831.59,4223 cw(c4831.59,4219.59) U6.4
  Bottom Layer w20: C52.2 C51.2 4215.88,4559.88 cw(c4251,4559.88) 4251,4595 4761,4595 ccw(c4761,4597) 4763,4597 ; POWER.3 4621,3210 4621,3197.25 4617,3197.25 4617,3158 ccw(c4647,3158) 4647,3128 5625,3128 ccw(c5625,3171) 5668,3171 5668,4426 ccw(c5611,4426) 5611,4483 4763,4483 ; C44.2 C43.2 4735,4675 cw(c4735,4647) 4763,4647 4763,4597 ; C47.2 cw(c4763.06,4165.06) 4761.56,4165.06 C48.2 ccw(c4761.56,4223.44) 4763,4223.44 4763,4483 ; 4763,4483 4763,4595 4763,4597
XTAL1: 16M.1 C2.1 U1.9 | length 666.5
  Top Layer w10: C2.1 3958,3657.56 16M.1 3958,3591 ccw(c3978.98,3591) 3978.98,3570.02 U1.9
XTAL2: 16M.2 C1.1 U1.10 | length 667.6
  Top Layer w10: C1.1 3956.56,3458.44 cw(c3956.56,3457) 16M.2 3958,3522 cw(c3980.43,3522) 3980.43,3544.43 U1.10
pads on no net: U1.1 U3.1 U3.3 U3.5 U3.7 U3.8 U4.1 U4.5 U4.8 U8.17 U9.17
copper on no net:
  other v3: 3230.83,3135.83 5789.17,3135.83 5789.17,4664.17 3230,4670

## Polygon pours and split planes (outlines as drawn)
AVSS on Bottom Layer "AVSS_BTU" (solid, pour order 11): 3120,3135.83 ccw(c3230.83,3135.83) 3230.83,3025 4085,3025 5781.01,3025 ccw(c5781.01,3143.99) 5900,3143.99 5900,4664.17 ccw(c5789.17,4664.17) 5789.17,4775 3230.83,4775 ccw(c3230.83,4664.17) 3120,4664.17
AVSS on Bottom Layer "AVSS_L02_P007" (solid, pour order 7): 4451,3582 4541,3582 4541,3260 4564,3260 cw(c4564,3259) 4565,3259 4565,3168 4470,3168 4470,3269 4448,3269
DGND on Bottom Layer "DGND_L02_P003" (solid, pour order 3): 5464.71,3568 5585.29,3568 cw(c5585.29,3528.59) 5624.71,3528.59 5624.71,3310.59 cw(c5590.56,3308.15) 5593,3274 5464.71,3274
DGND on Bottom Layer "DGND_L02_P002" (solid, pour order 2): 4869,3567 4559,3567 4559,3274 4871.54,3274
DGND on Bottom Layer "DGND_BTU" (solid, pour order 0): 4869,3567 cw(c4870,3567) 4870,3568 5464.71,3568 5464.71,3274 4868,3274
AVSS on Top Layer "AVSS_TOP" (solid, pour order 10): 3120,3135.83 ccw(c3230.83,3135.83) 3230.83,3025 4085,3025 5781.01,3025 ccw(c5781.01,3143.99) 5900,3143.99 5900,4664.17 ccw(c5789.17,4664.17) 5789.17,4775 3230.83,4775 ccw(c3230.83,4664.17) 3120,4664.17
AVSS on Top Layer "AVSS_L01_P006" (solid, pour order 6): 3862,3280 4066,3280 4066,3137 3863,3137
3V3 on Top Layer "3V3_L01_P005" (solid, pour order 5): 3688.5,3415 3860,3415 cw(c3860,3414) 3861,3414 3861,3290 3688,3290

## Silkscreen, mask and mechanical layers (free items; w line width, h text height)
Top Overlay:
  drawing of 1140 lines, arcs and shapes, not listed
  text "GPIO0" at 5395.55,3552.44 h40
  text "V5" at 5060.06,3545.67 h60
  text "V3" at 5260.06,3540.67 h60
Bottom Overlay:
  text "G" at 5011,3378.44 h40
  text "G" at 5110,3378.44 h40
  text "G" at 5212,3378.44 h40
  text "G" at 5312,3378.44 h40
  text "G" at 5411,3378.44 h40
  text "DIN" at 5026,3151 h40
  text "CS" at 5424,3151.44 h40
  text "DO" at 5122,3150.44 h40
  text "SCK" at 5235,3150.44 h40
  text "SYNC" at 5346,3149.44 h40
  text "+5" at 4443,3068.83 h60
  text "-5" at 4644,3068.67 h60
  text "G" at 4536,3067.67 h60
Bottom Solder:
  rectangle: 5500,4515 5605,4725
  rectangle: 3700,4520 3805,4730
Mechanical 1:
  lines w10: 3120,3135.83 ccw(c3230.83,3135.83) 3230.83,3025 4085,3025 5155,3025 5615,3025 5781.01,3025 ccw(c5781.01,3143.99) 5900,3143.99 5900,4664.17 ccw(c5789.17,4664.17) 5789.17,4775 3775,4775 3230.83,4775 ccw(c3230.83,4664.17) 3120,4664.17 3120,3135.83

## Text inside footprints (layer, text, board x,y; h text height)
U1: Mechanical 13 "*" at 4423,3736.5 h50
U3: Mechanical 13 "*" at 3599.5,4289 h50 r270
U4: Mechanical 13 "*" at 3598.5,3833 h50 r270
U5: Mechanical 13 "*" at 4566,4554.5 h50 r180
U6: Mechanical 13 "*" at 4855,4342.5 h50
U7: Mechanical 13 "*" at 4127,4199.5 h50 r180
U8: Mechanical 13 "*" at 4993.4,3906.42 h50 r180
U9: Mechanical 13 "*" at 4008.34,3942.9 h50